# Altium PCB LaptopCharger.PcbDoc
Units mm, origin at the board's own origin, x right, y up, seen from the top; angles counter-clockwise.
Board outline 40 x 32 mm, 2 copper layers (Top Layer, Bottom Layer); 48 components, 14 nets, 107 pads, 1039 vias.
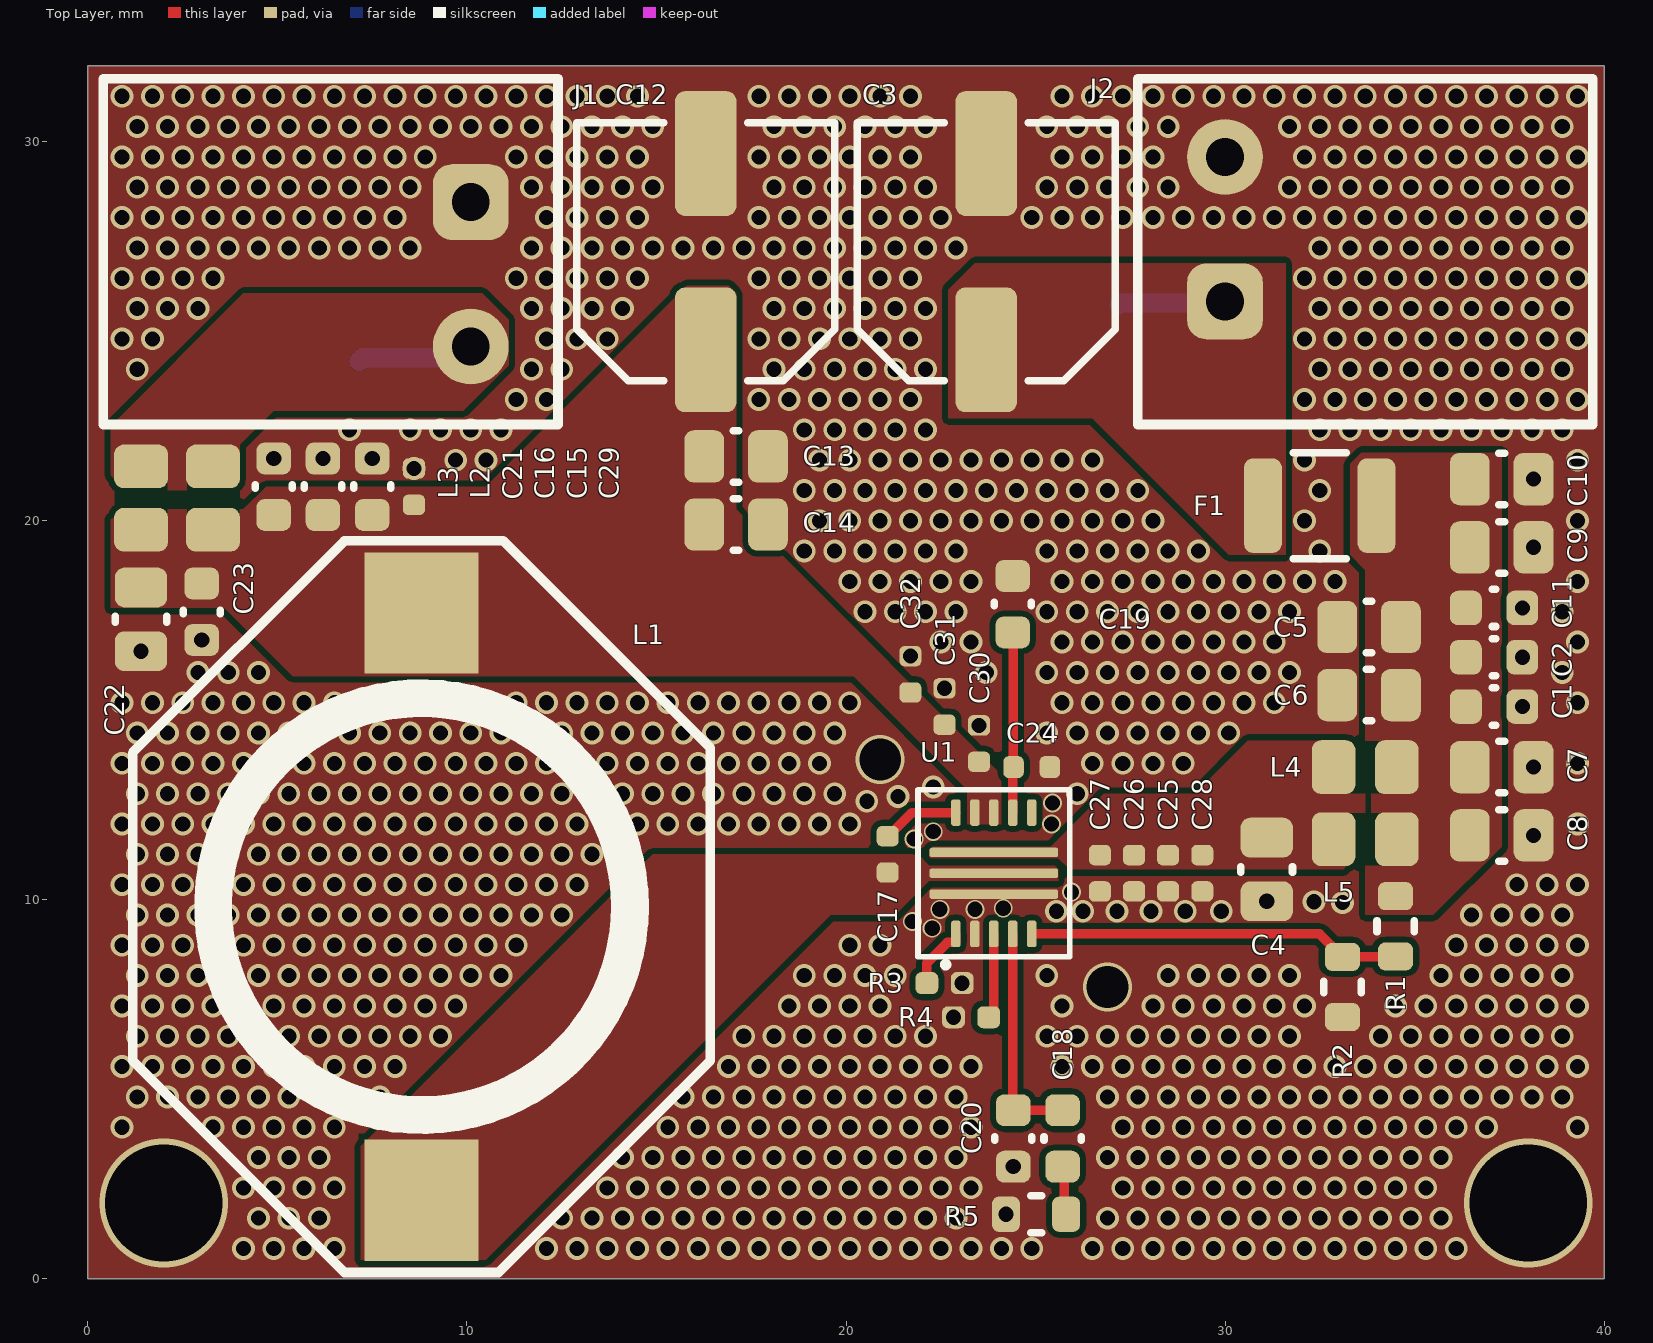
[diagram p0: Top Layer view]
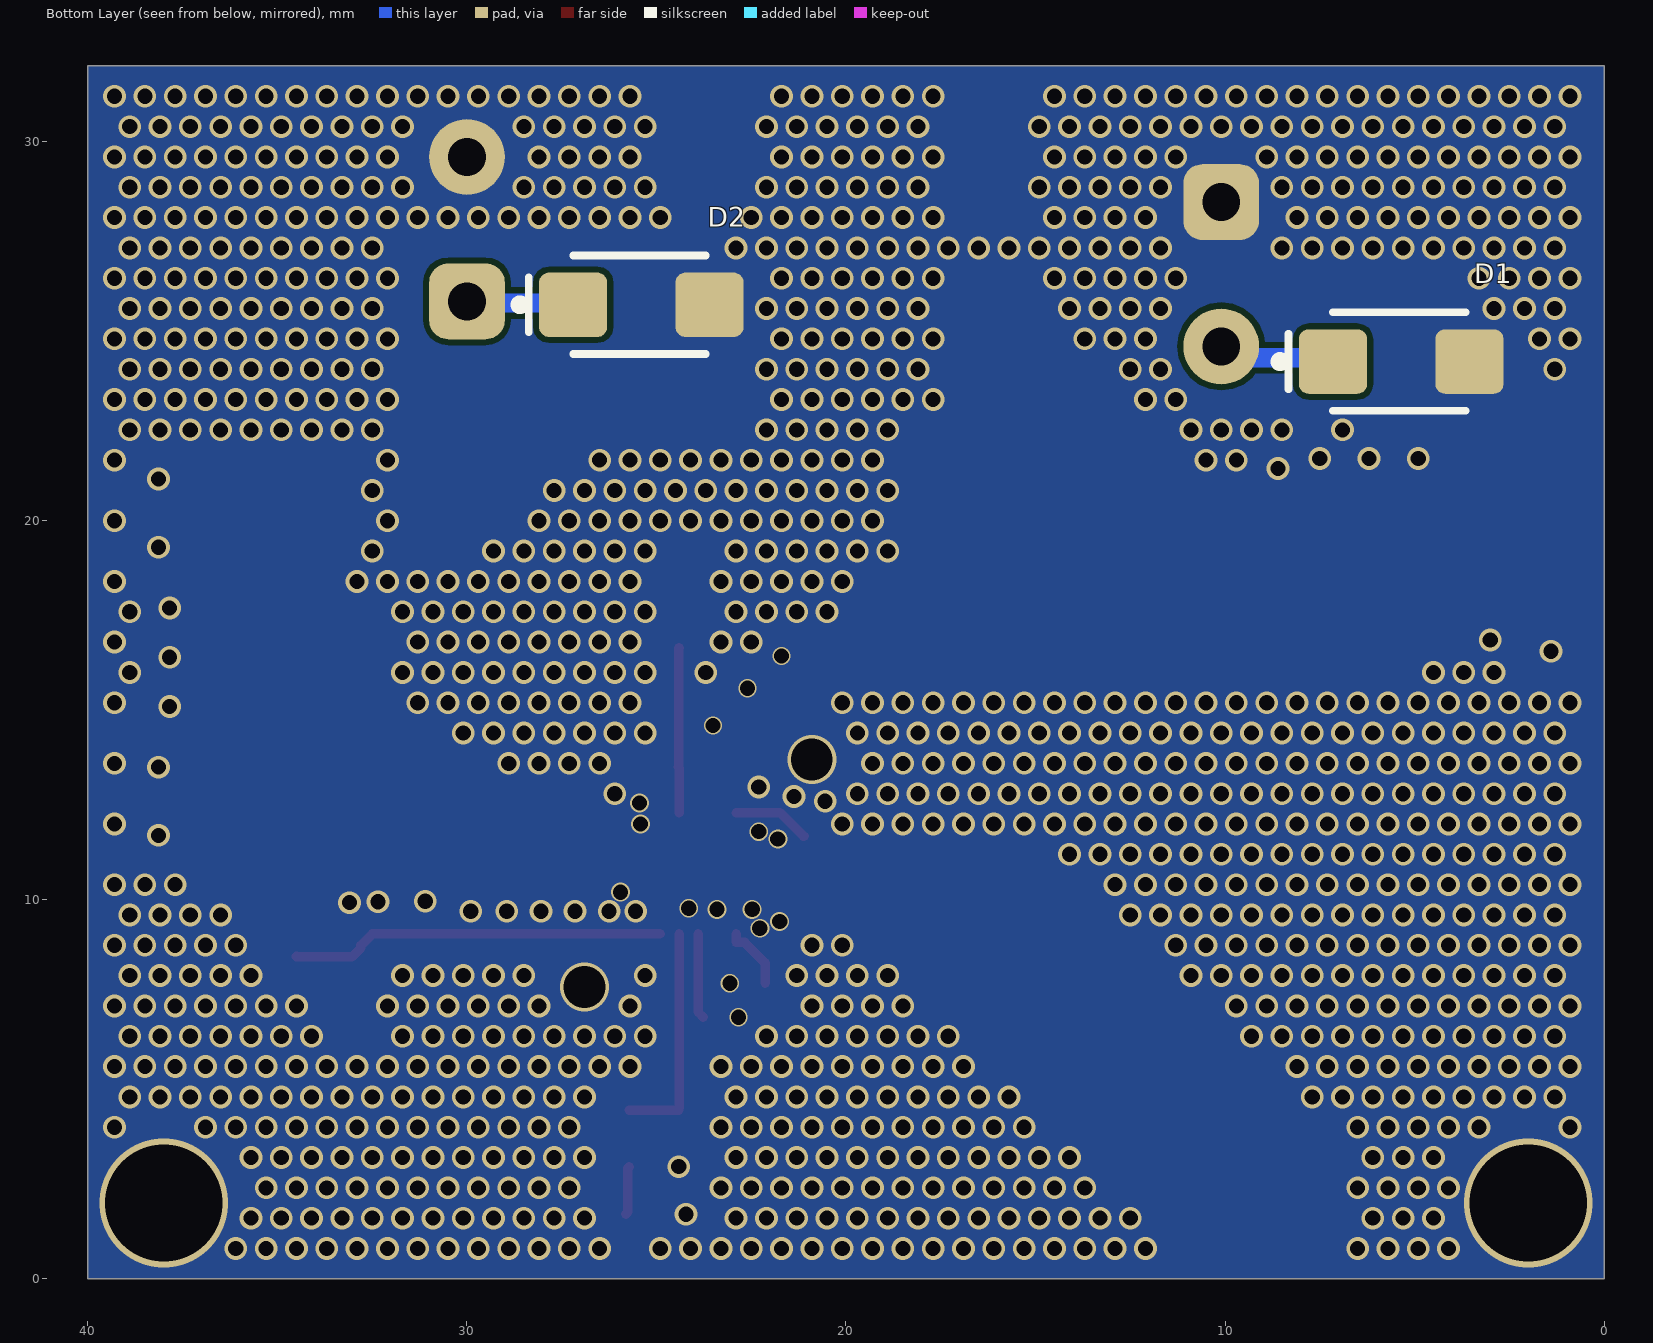
[diagram p1: Bottom Layer view, seen from below]
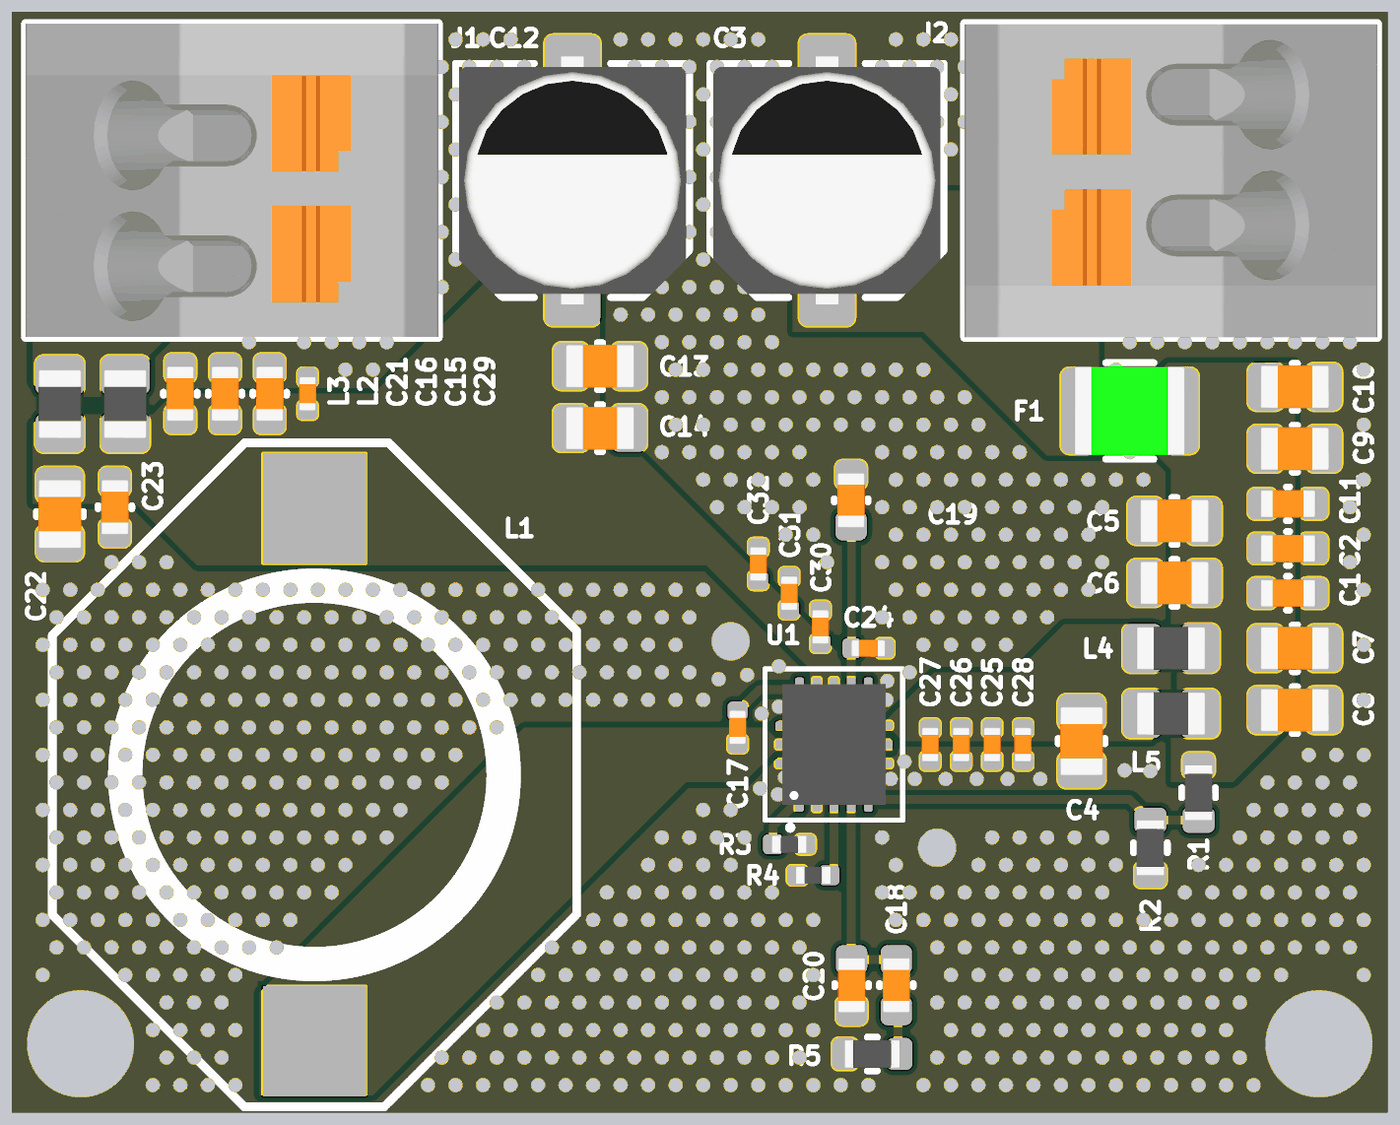
[diagram p2: 3D render of the assembled board from above, using the file's embedded part models]

## Layer stack, top to bottom
Top Solder: solder mask 0.0102, Solder Resist, Dk 3.5
Top Layer: signal copper 0.0356
Dielectric 1: dielectric 0.32, FR-4, Dk 4.8
Bottom Layer: signal copper 0.0356
Bottom Solder: solder mask 0.0102, Solder Resist, Dk 3.5

## Board outline
0,0 0,32 40,32 40,0

## Design rules (kind name [scope] priority, off if disabled: settings)
Clearance [All] p1: gap=0.15 ignorepadtopadclearanceinfootprint=FALSE except(0: Arc-Hole Track-Hole SMDPad-Hole THPad-Hole Via-Hole Fill-Hole Poly-Hole Region-Hole Text-Hole; 0.127: Arc-Via Track-Via SMDPad-Via THPad-Via Via-Via)
HoleSize [All] p1: absolutevalues=TRUE maxlimit=6.3 minlimit=0.2 maxpercent=80.000 minpercent=20.000
HoleToHoleClearance [All] p1: gap=0.127 allowstackedmicrovias=TRUE
MinimumSolderMaskSliver [All] p1: minsoldermaskwidth=0.15
PlaneConnect [All] p1: planeconnectstyle=Direct reliefexpansion=0.508 reliefentries=4 reliefconductorwidth=0.254 reliefairgap=0.254
PolygonConnect [All] p1: connectstyle=Direct reliefconductorwidth=0.254 reliefentries=4 polygonreliefangle="90 Angle" airgapwidth=0.254
RoutingVias [All] p1: holewidth=0.6 width=0.35 viastyle="Through Hole" minholewidth=0.35 minwidth=0.3 maxholewidth=1.7 maxwidth=1.5
SilkToSilkClearance [All] p1: silktosilkclearance=0.15
SilkToSolderMaskClearance [IsPad] p1: minsilkscreentomaskgap=0.08 clearancetoexposedcopper=TRUE
SolderMaskExpansion [All] p1: expansion=0.045 istentingtop=FALSE
Width [All] p1: maxlimit=1.524 minlimit=0.203 preferedwidth=0.254 minimp=50.000000 maximp=50.000000 favimp=50.000000
24 further rules are at their usual default settings.

## Components (designator, comment, footprint, x,y, rotation, side; value= is the part's Value field where it differs from the comment)
C1 "100nF" C0603_N 37.1,15.1 r0 top
C2 "100nF" C0603_N 37.1,16.4 r0 top
C3 "100uF" CPE_6.6x6.6x5.4 23.7,27.1 r90 top
C4 "10uF" C0805_N 31.1,10.8 r270 top
C5 "10uF" C0805_N 33.8,17.2 r180 top
C6 "10uF" C0805_N 33.8,15.4 r180 top
C7 "10uF" C0805_N 37.3,13.5 r0 top
C8 "10uF" C0805_N 37.3,11.7 r0 top
C9 "10uF" C0805_N 37.3,19.3 r0 top
C10 "10uF" C0805_N 37.3,21.1 r0 top
C11 "100nF" C0603_N 37.1,17.7 r0 top
C12 "100uF" CPE_6.6x6.6x5.4 16.3,27.1 r90 top
C13 "10uF" C0805_N 17.1,21.7 r0 top
C14 "10uF" C0805_N 17.1,19.9 r0 top
C15 "100nF" C0603_N 7.5,20.9 r90 top
C16 "100nF" C0603_N 6.2,20.9 r90 top
C17 "100n" C0402_N 21.1,11.2 r270 top
C18 "6.8nF" C0603_N 25.715,3.704 r270 top
C19 "4,7uF" C0603_N 24.4,17.8 r90 top
C20 "10pF" C0603_N 24.415,3.704 r270 top
C21 "100nF" C0603_N 4.9,20.9 r90 top
C22 "10uF" C0805_N 1.4,17.4 r270 top
C23 "100nF" C0603_N 3,17.6 r270 top
C24 "100n" C0402_N 24.9,13.5 r0 top
C25 "100n" C0402_N 28.5,10.7 r270 top
C26 "100n" C0402_N 27.6,10.7 r270 top
C27 "100n" C0402_N 26.7,10.7 r270 top
C28 "100n" C0402_N 29.4,10.7 r270 top
C29 "100n" C0402_N 8.6,20.9 r90 top
C30 "100n" C0402_N 23.509,14.121 r90 top
C31 "100n" C0402_N 22.6,15.1 r90 top
C32 "100n" C0402_N 21.7,15.95 r90 top
D1 "SMAJ15A" DO-214AC 5.35,24.2 r180 bottom
D2 "SMAJ15A" DO-214AC 25.4,25.7 r180 bottom
F1 "FUSE" FUSE1210 32.5,20.4 r0 top
J1 "" CABLE_ENTRY_SCREWLESS_2_45_381 6.4,27.1 r270 top
J2 "" CABLE_ENTRY_SCREWLESS_2_45_381 33.7,27.1 r90 top
L1 "3,3uH" IND_IDCS-7328 8.8,10.2 r90 top
L2 "=Value" BEAD_0805_N 3.3,20.6 r90 top
L3 "=Value" BEAD_0805_N 1.4,20.6 r90 top
L4 "=Value" BEAD_0805_N 33.7,13.5 r0 top
L5 "=Value" BEAD_0805_N 33.7,11.6 r0 top
R1 "RES" R0603_N 34.5,9.3 r270 top
R2 "RES" R0603_N 33.1,7.7 r270 top
R3 "75k" R0402_N 22.6,7.8 r0 top
R4 "RES" R0402_N 23.3,6.9 r180 top
R5 "15k" R0603_N 25.015,1.704 r180 top
U1 "TPS61178" VQFN-HR-13 23.9,10.7 r90 top

## Footprints (in the part's own frame and the unit in brackets; to place one, negate y for a bottom-side part, rotate by r counter-clockwise, add the part's x,y. Pads: shape width x height; smd on the part's side, far side on the other; paste and mask are expansions set on the pad)
BEAD_0805_N [mm] "Ferrite Bead, Chip; 2.00 mm L X 1.25 mm W X 1.10 mm H body"
  rrect43% 1.15x1.42 smd: 1(-0.835,0) 2(0.835,0)
  Top Layer pour cut-out: -0.5,-0.7 -0.5,0.7 0.5,0.7 0.5,-0.7
  body extent -1,-0.63 1,0.63, height 1.1
C0402_N [mm] "Capacitor, Chip; 1.00 mm L X 0.50 mm W X 0.55 mm H body"
  rrect52% 0.54x0.58 smd: 1(-0.48,0) 2(0.48,0)
  body extent -0.5,-0.25 0.5,0.25, height 0.55
C0603_N [mm] "Capacitor, Chip; 1.60 mm L X 0.80 mm W X 0.87 mm H body"
  rrect50% 0.84x0.91 smd: 1(-0.745,0) 2(0.745,0)
  silkscreen extent -0.05,-0.49 0.05,0.49, body extent -0.8,-0.4 0.8,0.4, height 0.87
C0805_N [mm] "Capacitor, Chip; 2.00 mm L X 1.25 mm W X 1.35 mm H body"
  rrect48% 1.05x1.38 smd: 1(-0.84,0) 2(0.84,0)
  silkscreen extent -0.08,-0.68 0.08,0.68, body extent -1,-0.63 1,0.63, height 1.35
CABLE_ENTRY_SCREWLESS_2_45_381 [mm] "2 pin, 3.81mm, 45°, Cable Entry, Screwless, (WR-TBL Serie 4173S)"
  rrect50% 2x2 hole 1: 1(-1.31,3.7)
  round 2 hole 1: 2(2.5,3.7)
  silkscreen extent -4.56,-6 4.56,6, body extent -4.56,-6 4.54,6, height 13.21
CPE_6.6x6.6x5.4 [mm] "Capacitor, Aluminum Electrolytic; 6.60 mm L X 6.60 mm W X 5.40 mm H body"
  rrect31% 3.29x1.62 smd: N(2.59,0) P(-2.59,0)
  silkscreen extent -3.4,-3.4 3.4,3.4, body extent -3.6,-3.3 3.6,3.3, height 5.4
DO-214AC [mm] "SMA"
  rrect30% 1.8x1.7 smd: A(1.8,0) C(-1.8,0)
  silkscreen extent -3.33,-1.3 1.7,1.3, body extent -2.55,-1.33 2.55,1.34, height 2.17
FUSE1210 [mm] "Fuse, Chip; 3.215 mm L X 2.575 mm W X 1.80 mm H body"
  rrect50% 1x2.5 smd: 1(-1.5,0) 2(1.5,0)
  silkscreen extent -0.7,-1.4 0.7,1.4, body extent -1.61,-1.29 1.61,1.29, height 1.8
IND_IDCS-7328 [mm] "IDCS-7328 Inductor package"
  rect 3.2x3 smd: 1(-8.128,0) 2(7.366,0)
  silkscreen extent -10.03,-7.62 9.27,7.62
R0402_N [mm] "Resistor, Chip; 1.00 mm L X 0.50 mm W X 0.40 mm H body"
  rrect52% 0.6x0.58 smd: 1(-0.465,0) 2(0.465,0)
  body extent -0.5,-0.25 0.5,0.25, height 0.4
R0603_N [mm] "Resistor, Chip; 1.60 mm L X 0.80 mm W X 0.55 mm H body"
  rrect51% 0.74x0.93 smd: 1(-0.795,0) 2(0.795,0)
  silkscreen extent -0.15,-0.49 0.15,0.49, body extent -0.8,-0.4 0.8,0.4, height 0.55
VQFN-HR-13 [mm] "VQFN 13 pin, 3.55 mm L X 3.05 mm W X 1 mm H body"
  rrect50% 0.7x0.25 smd mask+0.05: 1(-1.6,1) 2(-1.6,0.5) 3(-1.6,0) 4(-1.6,-0.5) 5(-1.6,-1) 9(1.6,-1) 10(1.6,-0.5) 11(1.6,0) 12(1.6,0.5) 13(1.6,1)
  rrect50% 0.25x3.4 smd mask+0.05: 6(-0.55,0) 7(0,0) 8(0.55,0)
  silkscreen extent -2.49,-2 2.2,2, body extent -1.75,-1.5 1.75,1.5, height 0.96

## Part data
C1 C2 C4 C5 C6 C7 C8 C9 C10 C11 C13 C14 C15 C16 C17 C18 C19 C20 C21 C22 C23 C24 C25 C26 C27 C28 C29 C30 C31 C32: library part CAP, RevS="$Rev:: 58        $"
C3 C12: library part CAP_POL, RevS="$Rev:: 58        $"
D1 D2: library part DIODE_ZENER
J1 J2: library part SOCHDR_2X1, "Socket", ComponentLink1Description=Manufacturer, ComponentLink1URL=http://www.we-online.de, ComponentLink2Description=Datasheet, ComponentLink2URL=http://katalog.we-online.de/em/datasheet/691412320002.pdf
L1: library part IND, "Inductor"
L2 L3 L4 L5: library part BEAD
R3 R5: library part RES
U1: "TPS61178x 20-V, 10-A Fully-Integrated Synchronous Boost with Load Disconnect Control"

## Via types
v1: diameter 0.6, hole 0.4, Top Layer to Bottom Layer, tented both sides, 1020 vias
v2: diameter 0.5, hole 0.4, Top Layer to Bottom Layer, tented both sides, 8 vias
v3: diameter 0.48, hole 0.4, Top Layer to Bottom Layer, tented both sides, 6 vias
v4: diameter 3.4, hole 3.1, Top Layer to Bottom Layer, tented both sides, 2 vias
v5: diameter 1.3, hole 1.1, Top Layer to Bottom Layer, tented both sides, 2 vias
v6: diameter 0.49, hole 0.4, Top Layer to Bottom Layer, tented both sides, 1 vias

## Nets (pads, with @x,y where several pads share a name; then routed paths per layer and width w, separated by ;. In a path a pad name is that pad's centre, name@x,y a point inside that pad or via, vN(x,y) a via of type N, cw(c..) or ccw(c..) an arc to the next point about the centre after c; other vN are vias at no path point)
+12: C12.P C13.1 C14.1 C15.1 C16.1 C21.1 C22.1 C23.1 C29.1 C30.1 C31.1 C32.1 L1.2 L2.1 L3.1 U1.11 U1.12
AGND: C1.2 C2.2 C3.N C4.2 C5.2 C6.2 C7.2 C8.2 C9.2 C10.2 C11.2 C12.N C13.2 C14.2 C15.2 C16.2 C19.2 C20.2 C21.2 C22.2 C23.2 C24.2 C25.2 C26.2 C27.2 C28.2 C29.2 C30.2 C31.2 C32.2 D1.A D2.A J1.1 J2.2 R2.2 R3.2 R4.2 R5.2 U1.2 U1.6
  other v1: 4.1,0.8 4.9,0.8 5.7,0.8 6.5,0.8 12.1,0.8 12.9,0.8 13.7,0.8 14.5,0.8 15.3,0.8 16.1,0.8 16.9,0.8 17.7,0.8 18.5,0.8 19.3,0.8 20.1,0.8 20.9,0.8 21.7,0.8 22.5,0.8 23.3,0.8 24.1,0.8 24.9,0.8 26.5,0.8 27.3,0.8 28.1,0.8 28.9,0.8 29.7,0.8 30.5,0.8 31.3,0.8 32.1,0.8 32.9,0.8 33.7,0.8 34.5,0.8 35.3,0.8 36.1,0.8 4.5,1.6 5.3,1.6 6.1,1.6 12.5,1.6 13.3,1.6 14.1,1.6 14.9,1.6 15.7,1.6 16.5,1.6 17.3,1.6 18.1,1.6 18.9,1.6 19.7,1.6 20.5,1.6 21.3,1.6 22.1,1.6 22.9,1.6 26.9,1.6 27.7,1.6 28.5,1.6 29.3,1.6 30.1,1.6 30.9,1.6 31.7,1.6 32.5,1.6 33.3,1.6 34.1,1.6 34.9,1.6 35.7,1.6 24.22,1.704 4.1,2.4 4.9,2.4 5.7,2.4 6.5,2.4 13.7,2.4 14.5,2.4 15.3,2.4 16.1,2.4 16.9,2.4 17.7,2.4 18.5,2.4 19.3,2.4 20.1,2.4 20.9,2.4 21.7,2.4 22.5,2.4 23.3,2.4 27.3,2.4 28.1,2.4 28.9,2.4 29.7,2.4 30.5,2.4 31.3,2.4 32.1,2.4 32.9,2.4 33.7,2.4 34.5,2.4 35.3,2.4 24.415,2.959 4.5,3.2 5.3,3.2 6.1,3.2 14.1,3.2 14.9,3.2 15.7,3.2 16.5,3.2 17.3,3.2 18.1,3.2 18.9,3.2 19.7,3.2 20.5,3.2 21.3,3.2 22.1,3.2 22.9,3.2 26.9,3.2 27.7,3.2 28.5,3.2 29.3,3.2 30.1,3.2 30.9,3.2 31.7,3.2 32.5,3.2 33.3,3.2 34.1,3.2 34.9,3.2 35.7,3.2 0.9,4 3.3,4 4.1,4 4.9,4 5.7,4 6.5,4 15.3,4 16.1,4 16.9,4 17.7,4 18.5,4 19.3,4 20.1,4 20.9,4 21.7,4 22.5,4 23.3,4 27.3,4 28.1,4 28.9,4 29.7,4 30.5,4 31.3,4 32.1,4 32.9,4 33.7,4 34.5,4 35.3,4 36.1,4 36.9,4 39.3,4 1.3,4.8 2.1,4.8 2.9,4.8 3.7,4.8 4.5,4.8 5.3,4.8 6.1,4.8 6.9,4.8 7.7,4.8 15.7,4.8 16.5,4.8 17.3,4.8 18.1,4.8 18.9,4.8 19.7,4.8 20.5,4.8 21.3,4.8 22.1,4.8 22.9,4.8 26.9,4.8 27.7,4.8 28.5,4.8 29.3,4.8 30.1,4.8 30.9,4.8 31.7,4.8 32.5,4.8 33.3,4.8 34.1,4.8 34.9,4.8 35.7,4.8 36.5,4.8 37.3,4.8 38.1,4.8 38.9,4.8 0.9,5.6 1.7,5.6 2.5,5.6 3.3,5.6 4.1,5.6 4.9,5.6 5.7,5.6 6.5,5.6 7.3,5.6 8.1,5.6 16.9,5.6 17.7,5.6 18.5,5.6 19.3,5.6 20.1,5.6 20.9,5.6 21.7,5.6 22.5,5.6 23.3,5.6 25.7,5.6 26.5,5.6 27.3,5.6 28.1,5.6 28.9,5.6 29.7,5.6 30.5,5.6 31.3,5.6 32.1,5.6 32.9,5.6 33.7,5.6 34.5,5.6 35.3,5.6 36.1,5.6 36.9,5.6 37.7,5.6 38.5,5.6 39.3,5.6 1.3,6.4 2.1,6.4 2.9,6.4 3.7,6.4 4.5,6.4 5.3,6.4 6.1,6.4 6.9,6.4 7.7,6.4 8.5,6.4 9.3,6.4 17.3,6.4 18.1,6.4 18.9,6.4 19.7,6.4 20.5,6.4 21.3,6.4 22.1,6.4 25.3,6.4 26.1,6.4 26.9,6.4 27.7,6.4 28.5,6.4 29.3,6.4 30.1,6.4 30.9,6.4 31.7,6.4 34.1,6.4 34.9,6.4 35.7,6.4 36.5,6.4 37.3,6.4 38.1,6.4 38.9,6.4 0.9,7.2 1.7,7.2 2.5,7.2 3.3,7.2 4.1,7.2 4.9,7.2 5.7,7.2 6.5,7.2 7.3,7.2 8.1,7.2 8.9,7.2 9.7,7.2 18.5,7.2 19.3,7.2 20.1,7.2 20.9,7.2 25.7,7.2 28.1,7.2 28.9,7.2 29.7,7.2 30.5,7.2 31.3,7.2 32.1,7.2 34.5,7.2 35.3,7.2 36.1,7.2 36.9,7.2 37.7,7.2 38.5,7.2 39.3,7.2 1.3,8 2.1,8 2.9,8 3.7,8 4.5,8 5.3,8 6.1,8 6.9,8 7.7,8 8.5,8 9.3,8 10.1,8 10.9,8 18.9,8 19.7,8 20.5,8 21.3,8 25.3,8 28.5,8 29.3,8 30.1,8 30.9,8 31.7,8 35.7,8 36.5,8 37.3,8 38.1,8 38.9,8 0.9,8.8 1.7,8.8 2.5,8.8 3.3,8.8 4.1,8.8 4.9,8.8 5.7,8.8 6.5,8.8 7.3,8.8 8.1,8.8 8.9,8.8 9.7,8.8 10.5,8.8 11.3,8.8 20.1,8.8 20.9,8.8 36.1,8.8 36.9,8.8 37.7,8.8 38.5,8.8 39.3,8.8 1.3,9.6 2.1,9.6 2.9,9.6 3.7,9.6 4.5,9.6 5.3,9.6 6.1,9.6 6.9,9.6 7.7,9.6 8.5,9.6 9.3,9.6 10.1,9.6 10.9,9.6 11.7,9.6 12.5,9.6 36.5,9.6 37.3,9.6 38.1,9.6 38.9,9.6 25.55,9.7 26.25,9.7 27.15,9.7 28.05,9.7 28.95,9.7 29.9,9.7 33.1,9.925 31.1,9.96 32.35,9.95 0.9,10.4 1.7,10.4 2.5,10.4 3.3,10.4 4.1,10.4 4.9,10.4 5.7,10.4 6.5,10.4 7.3,10.4 8.1,10.4 8.9,10.4 9.7,10.4 10.5,10.4 11.3,10.4 12.1,10.4 12.9,10.4 37.7,10.4 38.5,10.4 39.3,10.4 1.3,11.2 2.1,11.2 2.9,11.2 3.7,11.2 4.5,11.2 5.3,11.2 6.1,11.2 6.9,11.2 7.7,11.2 8.5,11.2 9.3,11.2 10.1,11.2 10.9,11.2 11.7,11.2 12.5,11.2 13.3,11.2 14.1,11.2 38.14,11.7 0.9,12 1.7,12 2.5,12 3.3,12 4.1,12 4.9,12 5.7,12 6.5,12 7.3,12 8.1,12 8.9,12 9.7,12 10.5,12 11.3,12 12.1,12 12.9,12 13.7,12 14.5,12 15.3,12 16.1,12 16.9,12 17.7,12 18.5,12 19.3,12 20.1,12 39.3,12 20.55,12.6 21.375,12.725 1.3,12.8 2.1,12.8 2.9,12.8 3.7,12.8 4.5,12.8 5.3,12.8 6.1,12.8 6.9,12.8 7.7,12.8 8.5,12.8 9.3,12.8 10.1,12.8 10.9,12.8 11.7,12.8 12.5,12.8 13.3,12.8 14.1,12.8 14.9,12.8 15.7,12.8 16.5,12.8 17.3,12.8 18.1,12.8 18.9,12.8 19.7,12.8 26.1,12.8 22.3,12.975 38.14,13.5 0.9,13.6 1.7,13.6 2.5,13.6 3.3,13.6 4.1,13.6 4.9,13.6 5.7,13.6 6.5,13.6 7.3,13.6 8.1,13.6 8.9,13.6 9.7,13.6 10.5,13.6 11.3,13.6 12.1,13.6 12.9,13.6 13.7,13.6 14.5,13.6 15.3,13.6 16.1,13.6 16.9,13.6 17.7,13.6 18.5,13.6 19.3,13.6 26.5,13.6 27.3,13.6 28.1,13.6 28.9,13.6 39.3,13.6 1.3,14.4 2.1,14.4 2.9,14.4 3.7,14.4 4.5,14.4 5.3,14.4 6.1,14.4 6.9,14.4 7.7,14.4 8.5,14.4 9.3,14.4 10.1,14.4 10.9,14.4 11.7,14.4 12.5,14.4 13.3,14.4 14.1,14.4 14.9,14.4 15.7,14.4 16.5,14.4 17.3,14.4 18.1,14.4 18.9,14.4 19.7,14.4 25.3,14.4 26.1,14.4 26.9,14.4 27.7,14.4 28.5,14.4 29.3,14.4 30.1,14.4 37.845,15.1 0.9,15.2 1.7,15.2 2.5,15.2 3.3,15.2 4.1,15.2 4.9,15.2 5.7,15.2 6.5,15.2 7.3,15.2 8.1,15.2 8.9,15.2 9.7,15.2 10.5,15.2 11.3,15.2 12.1,15.2 12.9,15.2 13.7,15.2 14.5,15.2 15.3,15.2 16.1,15.2 16.9,15.2 17.7,15.2 18.5,15.2 19.3,15.2 20.1,15.2 25.7,15.2 26.5,15.2 27.3,15.2 28.1,15.2 28.9,15.2 29.7,15.2 30.5,15.2 31.3,15.2 39.3,15.2 2.9,16 3.7,16 4.5,16 23.7,16 25.3,16 26.1,16 26.9,16 27.7,16 28.5,16 29.3,16 30.1,16 30.9,16 31.7,16 38.9,16 37.845,16.4 1.4,16.56 22.5,16.8 23.3,16.8 25.7,16.8 26.5,16.8 27.3,16.8 28.1,16.8 28.9,16.8 29.7,16.8 30.5,16.8 31.3,16.8 39.3,16.8 3,16.855 20.5,17.6 21.3,17.6 22.1,17.6 22.9,17.6 25.3,17.6 26.1,17.6 26.9,17.6 27.7,17.6 28.5,17.6 29.3,17.6 30.1,17.6 30.9,17.6 31.7,17.6 38.9,17.6 37.845,17.7 20.1,18.4 20.9,18.4 21.7,18.4 22.5,18.4 23.3,18.4 25.7,18.4 26.5,18.4 27.3,18.4 28.1,18.4 28.9,18.4 29.7,18.4 30.5,18.4 31.3,18.4 32.1,18.4 32.9,18.4 39.3,18.4 18.9,19.2 19.7,19.2 20.5,19.2 21.3,19.2 22.1,19.2 22.9,19.2 25.3,19.2 26.1,19.2 26.9,19.2 27.7,19.2 28.5,19.2 29.3,19.2 32.5,19.2 38.14,19.3 19.3,20 20.1,20 20.9,20 21.7,20 22.5,20 23.3,20 24.1,20 24.9,20 25.7,20 26.5,20 27.3,20 28.1,20 32.1,20 39.3,20 18.9,20.8 19.7,20.8 20.5,20.8 21.3,20.8 22.1,20.8 22.9,20.8 23.7,20.8 24.5,20.8 25.3,20.8 26.1,20.8 26.9,20.8 27.7,20.8 32.5,20.8 38.14,21.1 8.6,21.38 9.7,21.6 10.5,21.6 19.3,21.6 20.1,21.6 20.9,21.6 21.7,21.6 22.5,21.6 23.3,21.6 24.1,21.6 24.9,21.6 25.7,21.6 26.5,21.6 32.1,21.6 39.3,21.6 4.9,21.645 6.2,21.645 7.5,21.645 6.9,22.4 8.5,22.4 9.3,22.4 10.1,22.4 10.9,22.4 18.9,22.4 19.7,22.4 20.5,22.4 21.3,22.4 22.1,22.4 32.5,22.4 33.3,22.4 34.1,22.4 34.9,22.4 35.7,22.4 36.5,22.4 37.3,22.4 38.1,22.4 38.9,22.4 11.3,23.2 12.1,23.2 17.7,23.2 18.5,23.2 19.3,23.2 20.1,23.2 20.9,23.2 21.7,23.2 32.1,23.2 32.9,23.2 33.7,23.2 34.5,23.2 35.3,23.2 36.1,23.2 36.9,23.2 37.7,23.2 38.5,23.2 39.3,23.2 1.3,24 11.7,24 12.5,24 18.1,24 18.9,24 19.7,24 20.5,24 21.3,24 22.1,24 32.5,24 33.3,24 34.1,24 34.9,24 35.7,24 36.5,24 37.3,24 38.1,24 38.9,24 0.9,24.8 1.7,24.8 12.1,24.8 12.9,24.8 13.7,24.8 17.7,24.8 18.5,24.8 19.3,24.8 20.1,24.8 20.9,24.8 21.7,24.8 32.1,24.8 32.9,24.8 33.7,24.8 34.5,24.8 35.3,24.8 36.1,24.8 36.9,24.8 37.7,24.8 38.5,24.8 39.3,24.8 1.3,25.6 2.1,25.6 2.9,25.6 11.7,25.6 12.5,25.6 13.3,25.6 14.1,25.6 18.1,25.6 18.9,25.6 19.7,25.6 20.5,25.6 21.3,25.6 22.1,25.6 32.5,25.6 33.3,25.6 34.1,25.6 34.9,25.6 35.7,25.6 36.5,25.6 37.3,25.6 38.1,25.6 38.9,25.6 0.9,26.4 1.7,26.4 2.5,26.4 3.3,26.4 11.3,26.4 12.1,26.4 12.9,26.4 13.7,26.4 14.5,26.4 17.7,26.4 18.5,26.4 19.3,26.4 20.1,26.4 20.9,26.4 21.7,26.4 32.1,26.4 32.9,26.4 33.7,26.4 34.5,26.4 35.3,26.4 36.1,26.4 36.9,26.4 37.7,26.4 38.5,26.4 39.3,26.4 1.3,27.2 2.1,27.2 2.9,27.2 3.7,27.2 4.5,27.2 5.3,27.2 6.1,27.2 6.9,27.2 7.7,27.2 8.5,27.2 11.7,27.2 12.5,27.2 13.3,27.2 14.1,27.2 14.9,27.2 15.7,27.2 16.5,27.2 17.3,27.2 18.1,27.2 18.9,27.2 19.7,27.2 20.5,27.2 21.3,27.2 22.1,27.2 22.9,27.2 32.5,27.2 33.3,27.2 34.1,27.2 34.9,27.2 35.7,27.2 36.5,27.2 37.3,27.2 38.1,27.2 38.9,27.2 0.9,28 1.7,28 2.5,28 3.3,28 4.1,28 4.9,28 5.7,28 6.5,28 7.3,28 8.1,28 12.1,28 12.9,28 13.7,28 14.5,28 17.7,28 18.5,28 19.3,28 20.1,28 20.9,28 21.7,28 22.5,28 24.9,28 25.7,28 26.5,28 27.3,28 28.1,28 28.9,28 29.7,28 30.5,28 31.3,28 32.1,28 32.9,28 33.7,28 34.5,28 35.3,28 36.1,28 36.9,28 37.7,28 38.5,28 39.3,28 1.3,28.8 2.1,28.8 2.9,28.8 3.7,28.8 4.5,28.8 5.3,28.8 6.1,28.8 6.9,28.8 7.7,28.8 8.5,28.8 11.7,28.8 12.5,28.8 13.3,28.8 14.1,28.8 14.9,28.8 18.1,28.8 18.9,28.8 19.7,28.8 20.5,28.8 21.3,28.8 22.1,28.8 25.3,28.8 26.1,28.8 26.9,28.8 27.7,28.8 28.5,28.8 31.7,28.8 32.5,28.8 33.3,28.8 34.1,28.8 34.9,28.8 35.7,28.8 36.5,28.8 37.3,28.8 38.1,28.8 38.9,28.8 0.9,29.6 1.7,29.6 2.5,29.6 3.3,29.6 4.1,29.6 4.9,29.6 5.7,29.6 6.5,29.6 7.3,29.6 8.1,29.6 8.9,29.6 11.3,29.6 12.1,29.6 12.9,29.6 13.7,29.6 14.5,29.6 17.7,29.6 18.5,29.6 19.3,29.6 20.1,29.6 20.9,29.6 21.7,29.6 25.7,29.6 26.5,29.6 27.3,29.6 28.1,29.6 32.1,29.6 32.9,29.6 33.7,29.6 34.5,29.6 35.3,29.6 36.1,29.6 36.9,29.6 37.7,29.6 38.5,29.6 39.3,29.6 1.3,30.4 2.1,30.4 2.9,30.4 3.7,30.4 4.5,30.4 5.3,30.4 6.1,30.4 6.9,30.4 7.7,30.4 8.5,30.4 9.3,30.4 10.1,30.4 10.9,30.4 11.7,30.4 12.5,30.4 13.3,30.4 14.1,30.4 14.9,30.4 18.1,30.4 18.9,30.4 19.7,30.4 20.5,30.4 21.3,30.4 22.1,30.4 25.3,30.4 26.1,30.4 26.9,30.4 27.7,30.4 28.5,30.4 31.7,30.4 32.5,30.4 33.3,30.4 34.1,30.4 34.9,30.4 35.7,30.4 36.5,30.4 37.3,30.4 38.1,30.4 38.9,30.4 0.9,31.2 1.7,31.2 2.5,31.2 3.3,31.2 4.1,31.2 4.9,31.2 5.7,31.2 6.5,31.2 7.3,31.2 8.1,31.2 8.9,31.2 9.7,31.2 10.5,31.2 11.3,31.2 12.1,31.2 12.9,31.2 13.7,31.2 14.5,31.2 17.7,31.2 18.5,31.2 19.3,31.2 20.1,31.2 20.9,31.2 21.7,31.2 25.7,31.2 26.5,31.2 27.3,31.2 28.1,31.2 28.9,31.2 29.7,31.2 30.5,31.2 31.3,31.2 32.1,31.2 32.9,31.2 33.7,31.2 34.5,31.2 35.3,31.2 36.1,31.2 36.9,31.2 37.7,31.2 38.5,31.2 39.3,31.2
  other v2: 22.275,9.25 21.75,9.425 22.475,9.75 23.4,9.75 25.95,10.2 21.8,11.6 25.425,12 25.45,12.55
  other v3: 22.835,6.9 23.065,7.8 24.15,9.775 23.509,14.601 22.6,15.58 21.7,16.43
  other v4: 2,2 38,2
  other v5: 26.9,7.7 20.9,13.7
  other v6: 22.3,11.8
FB: R1.2 R2.1 U1.5 | length 9.9
  Top Layer w0.254: U1.5@24.901,9.1 32.495,9.1 32.8,8.795 32.8,8.733 33.038,8.495 R2.1 33.097,8.497 33.1,8.5 34.495,8.5 R1.2
NetC1_1: C1.1 C2.1 C5.1 C6.1 C7.1 C8.1 C9.1 C10.1 C11.1 F1.2 L4.2 L5.2 R1.1
NetC3_P: C3.P D2.C F1.1 J2.1 | length 2.8
  Bottom Layer w0.508: D2.C 27.245,25.745 29.955,25.745 J2.1
NetC17_1: C17.1 U1.13 | length 2.1
  Top Layer w0.254: C17.1 21.12,11.68 21.74,12.3 U1.13
NetC17_2: C17.2 L1.1 U1.7
NetC18_1: C18.1 C20.1 U1.4 | length 5.9
  Top Layer w0.254: C20.1@24.4,4.5 U1.4 ; C20.1 C18.1
NetC18_2: C18.2 R5.1 | length 1.3
  Top Layer w0.254: C18.2 25.762,2.912 25.762,1.752 R5.1
NetC19_1: C19.1 C24.1 U1.10 | length 4.4
  Top Layer w0.254: U1.10 U1.10 24.402,13.482 C24.1 24.41,13.51 24.41,16.645 C19.1@24.4,16.655
NetD1_C: D1.C J1.2 L2.2 L3.2 | length 3.1
  Bottom Layer w0.508: D1.C 7.25,24.3 9.396,24.3 9.696,24.6 J1.2
NetR3_1: R3.1 U1.1 | length 1.7
  Top Layer w0.254: R3.1 22.135,8.335 22.677,8.877 22.898,8.877 22.9,8.879 U1.1
NetR4_1: R4.1 U1.3 | length 2.3
  Top Layer w0.254: R4.1 23.898,7.033 23.898,9.098 U1.3
Vout: C4.1 C25.1 C26.1 C27.1 C28.1 L4.1 L5.1 U1.8
pads on no net: U1.9

## Polygon pours and split planes (outlines as drawn)
AGND on Top Layer "Top Layer-No Net" (solid, pour order 10): 0,0 0,32 40,32 40,0
NetC3_P on Top Layer "NONET_L01_P-001" (solid, pour order 7): 31.6,19.1 31.6,26.8 23.4,26.8 22.7,26.1 22.7,22.7 26.5,22.7 30.1,19.1
NetC1_1 on Top Layer "NONET_L01_P-001" (solid, pour order 6): 33.7,9.6 35.5,9.6 37.3,11.4 37.3,21.8 33.6,21.8 33.3,21.5 33.3,19.1 33.7,18.7
+12 on Top Layer "NONET_L01_P-001" (solid, pour order 5): 0.6,20.3 0.6,17.7 3.6,17.7 5.4,15.9 20.2,15.9 23.2,12.9 23.2,12 24.1,12 24.1,13.3 17.1,20.3 17.1,26 16.9,26.2 15.8,26.2 10.5,20.9 4.7,20.9 4.1,20.3
NetD1_C on Top Layer "NONET_L01_P-001" (solid, pour order 4): 11.1,24.1 9.9,22.9 4.9,22.9 4,22 4,21 3.8,20.8 0.8,20.8 0.8,21 0.6,21.2 0.6,22.5 4.1,26 10.4,26 11.1,25.3
Vout on Top Layer "NONET_L01_P-001" (solid, pour order 3): 22.2,11.4 22.2,11.1 25.6,11.1 25.9,10.8 33.6,10.8 33.7,10.9 33.7,14.2 30.6,14.2 29.2,12.8 26.8,12.8 25.4,11.4
NetC17_2 on Top Layer "NONET_L01_P-001" (solid, pour order 2): 25.6,10.496 22.2,10.496 21.304,9.6 19.6,9.6 10.5,0.5 7.2,0.5 7.2,3.5 14.9,11.2 21.9,11.2 22.2,10.9 25.6,10.9
AGND on Bottom Layer "Top Layer-No Net1" (solid, pour order 11): 0,0 0,32 40,32 40,0

## Silkscreen, mask and mechanical layers (free items; w line width, h text height)
Mechanical 1:
  the board outline again, w0.152